# EAGLE board rPiMotorShield (do last) (EAGLE 7.5.0)
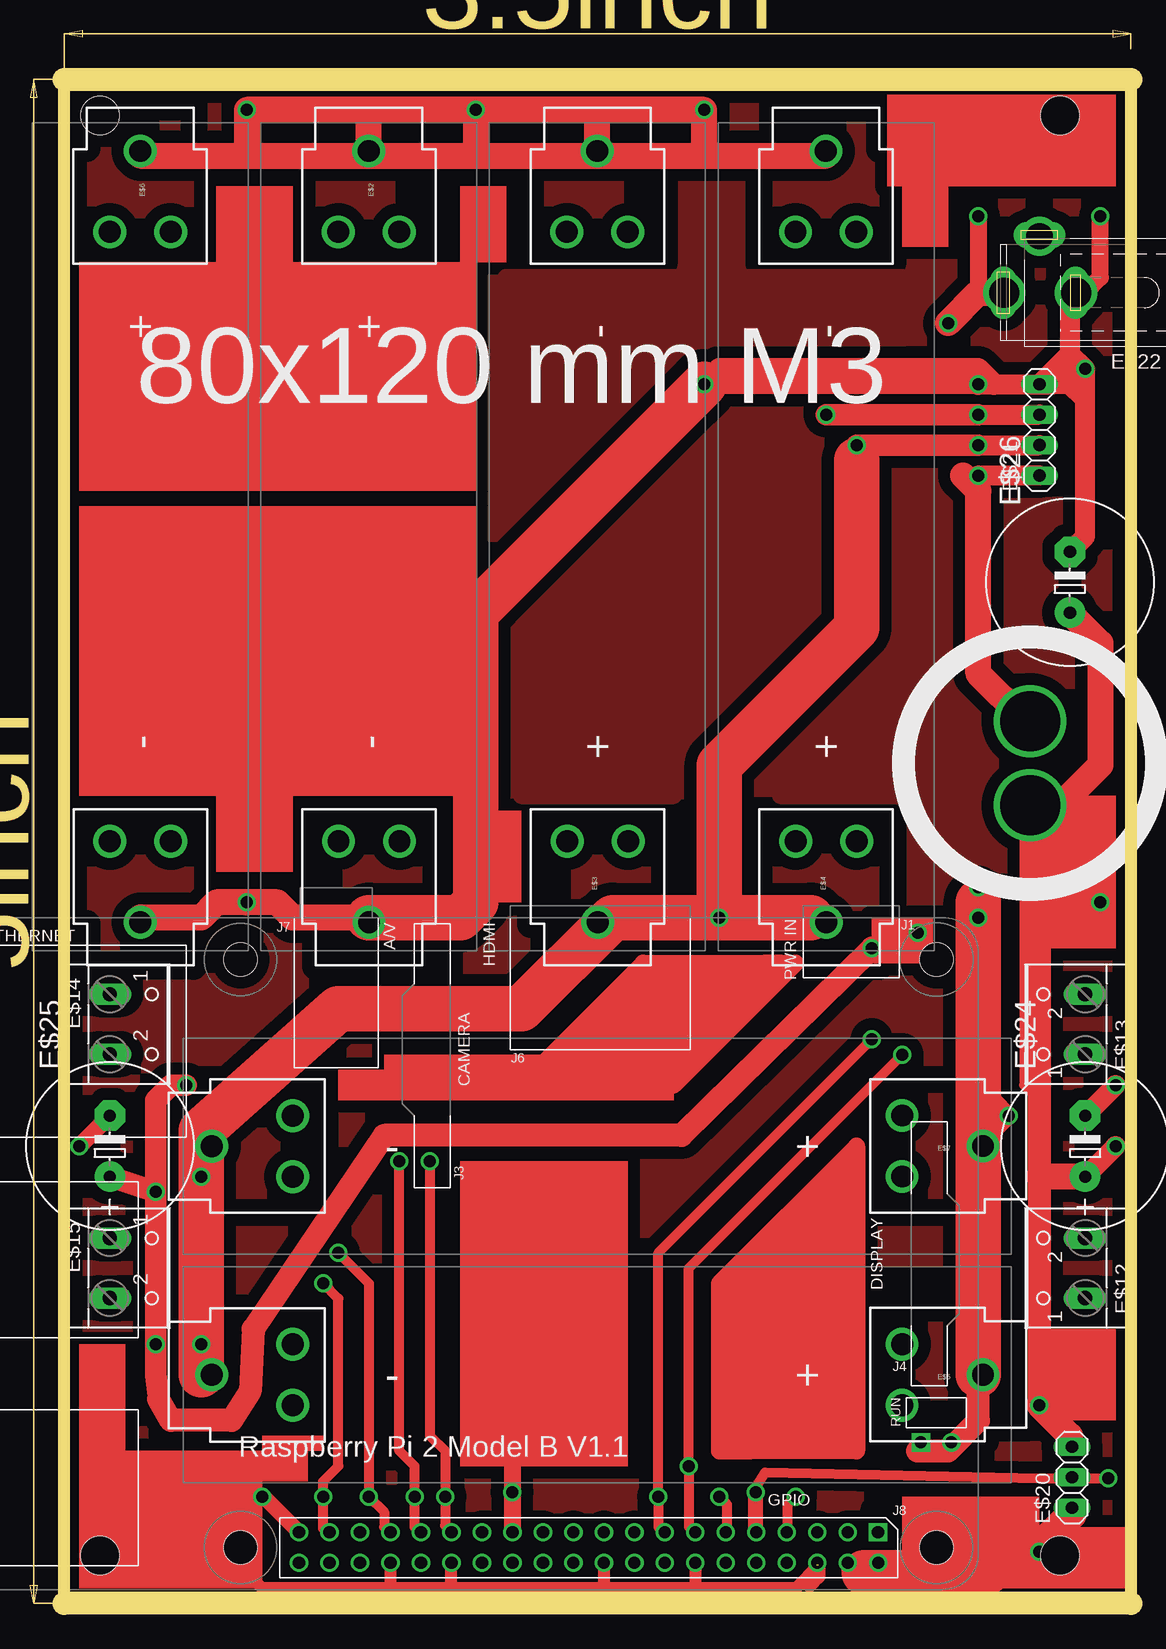
[diagram p0: board, top side]
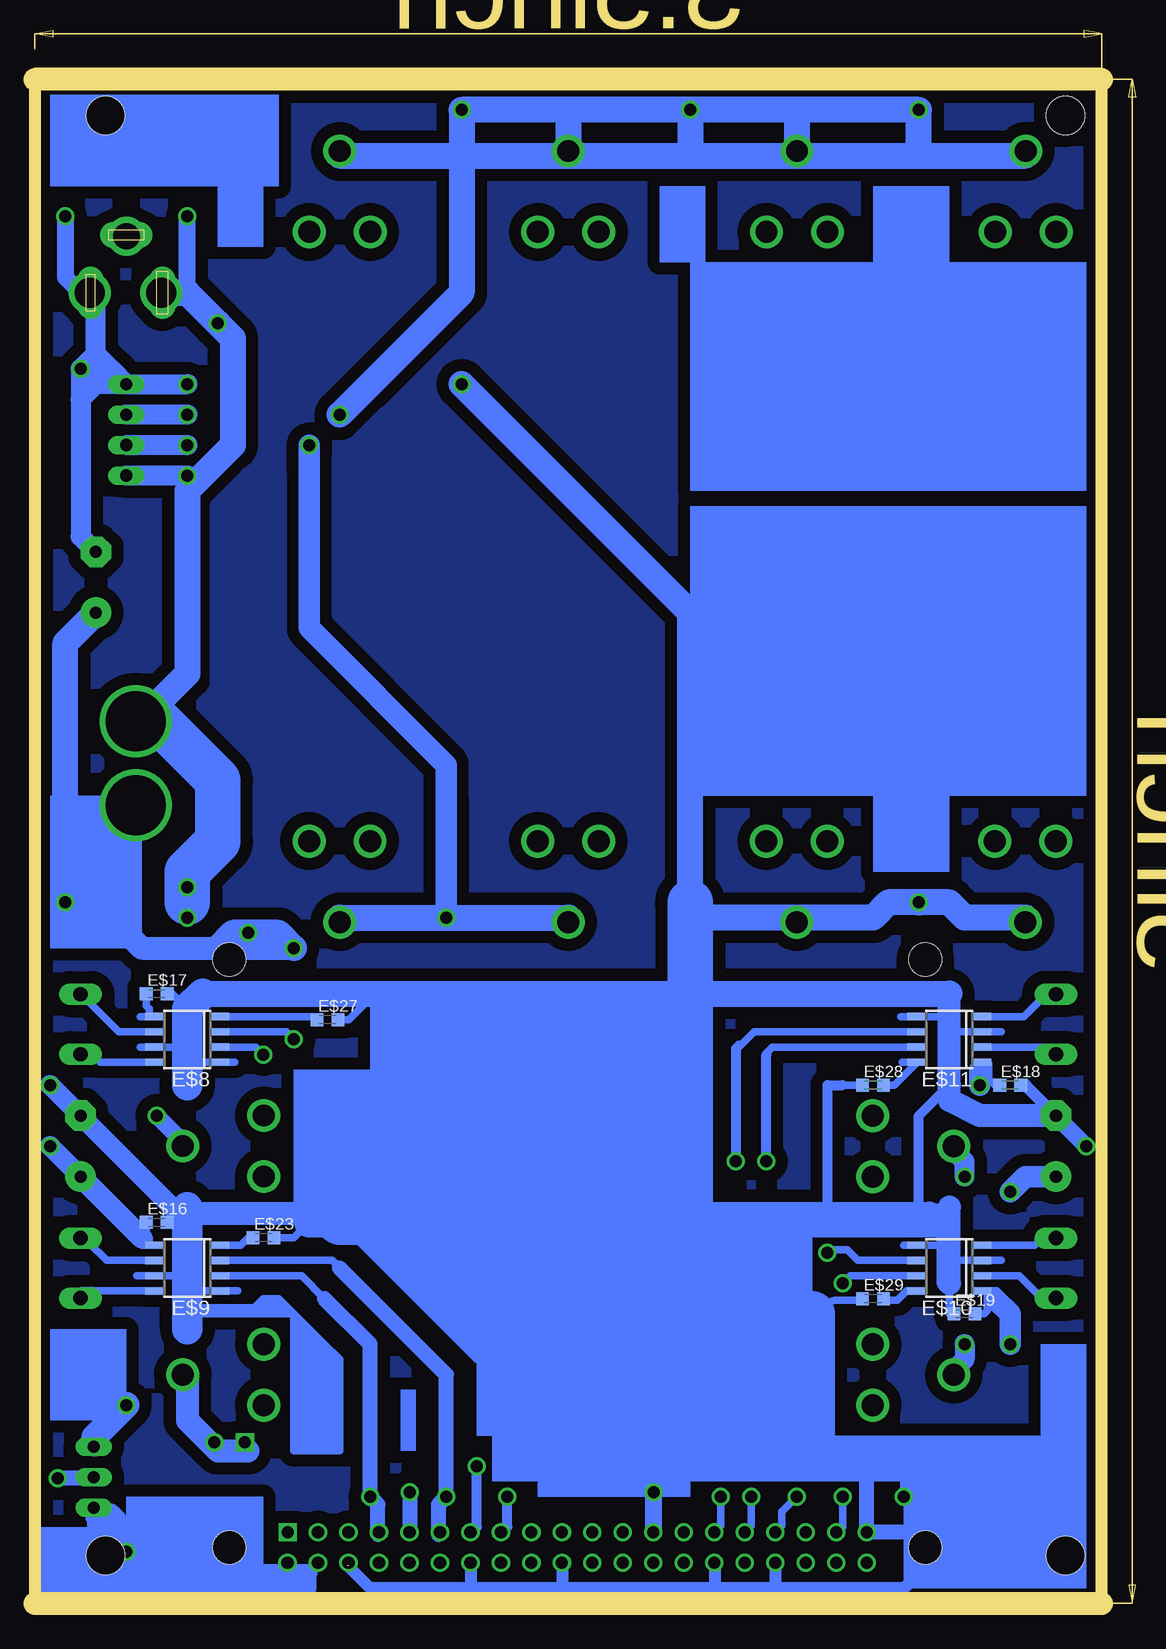
[diagram p1: board, bottom side, seen from below]

Size 88.9 x 127 mm. Coordinates in mm from the lower left corner, seen from the top.
Outline: 0,0 0,127 88.9,127 88.9,0 0,0
Copper layers (1*16): Top 0.035mm / dielectric 1.5mm / Bottom 0.035mm
Design rules "default": minimum track width 10mil, minimum drill 0.6mm, track to track 8mil, track to pad 8mil, pad to pad 8mil, via to via 8mil, smd to smd 8mil, copper to edge 40mil, drill to drill 8mil, minimum pad ring 10mil, minimum via ring 8mil, stop-mask expansion 4mil, vias tented up to drill 0mil, thermal gap 10mil
Holes 3.2 mm at 3,124 83,124 83,4 3,4

## Footprints (pad centres in the part's own frame; a part is rotated, then mirrored left to right if it is on the bottom)
RPI2 = drill 1.016 square: P$1 8.37,51.23; P$41 4.8,43.74 | drill 1.016: P$2 8.357,53.772; P$3 10.897,51.232; P$4 10.897,53.772; P$5 13.437,51.232; P$6 13.437,53.772; P$7 15.977,51.232; P$8 15.977,53.772; P$9 18.517,51.232; P$10 18.517,53.772; P$11 21.057,51.232; P$12 21.057,53.772; P$13 23.597,51.232; P$14 23.597,53.772; P$15 26.137,51.232; P$16 26.137,53.772; P$17 28.677,51.232; P$18 28.677,53.772; P$19 31.217,51.232; P$20 31.217,53.772; P$21 33.757,51.232; P$22 33.757,53.772; P$23 36.297,51.232; P$24 36.297,53.772; P$25 38.837,51.232; P$26 38.837,53.772; P$27 41.377,51.232; P$28 41.377,53.772; P$29 43.917,51.232; P$30 43.917,53.772; P$31 46.457,51.232; P$32 46.457,53.772; P$33 48.997,51.232; P$34 48.997,53.772; P$35 51.537,51.232; P$36 51.537,53.772; P$37 54.077,51.232; P$38 54.077,53.772; P$39 56.617,51.232; P$40 56.617,53.772; P$42 2.26,43.74 | hole 2.75: 3.5,3.5; 61.5,3.5; 3.5,52.5; 61.5,52.5
BATTERY_18650-HOLDER = drill 1.829: GND@1 32.128,0.01; GND@2 25.38,2.55; GND@3 25.38,-2.53; PWR@1 -32.128,-0.01; PWR@2 -25.38,2.53; PWR@3 -25.38,-2.55
D_R-PDSO-G8 = smd 0.6 x 1.5: 1 -1.905,-2.75; 2 -0.635,-2.75; 3 0.635,-2.75; 4 1.905,-2.75; 5 1.905,2.75; 6 0.635,2.75; 7 -0.635,2.75; 8 -1.905,2.75
2PIN-SCREW-TERMINAL = drill 1.194 long: 1 -2.5,-1.27; 2 2.5,-1.27
C0603K = smd 1.05 x 1.08: 1 -0.875,0; 2 0.875,0
1X03 = drill 1.016 long: 1 -2.54,0; 2 0,0; 3 2.54,0
1X04 = drill 1.016 long: 1 -3.81,0; 2 -1.27,0; 3 1.27,0; 4 3.81,0
5.5-2.5-BARRELCONNECTOR = drill 0.8 pad 2.184 long: 1 -3,0; 2 0,-4.8 | drill 1 pad 2.184 long: 3 3,0 | drill 2.5: P$1 -3.048,0; P$2 2.921,0 | drill 2.2: P$3 0,-4.699
E5-13 = drill 1.016 pad 2.54: + -2.54,0 | drill 1.016 pad 2.54 octagon: - 2.54,0

## Placement (x,y rotation side)
E$1  [RPI2]  76.2,57.15 180 top
E$2  [BATTERY_18650-HOLDER]  25.4,88.9 270 top
E$3  [BATTERY_18650-HOLDER]  44.45,88.9 90 top
E$4  [BATTERY_18650-HOLDER]  63.5,88.9 90 top
E$5  [BATTERY_18650-HOLDER]  44.45,19.05 180 top
E$6  [BATTERY_18650-HOLDER]  6.35,88.9 270 top
E$7  [BATTERY_18650-HOLDER]  44.45,38.1 180 top
E$8  [D_R-PDSO-G8]  76.2,46.99 90 bottom
E$9  [D_R-PDSO-G8]  76.2,27.94 90 bottom
E$10  [D_R-PDSO-G8]  12.7,27.94 90 bottom
E$11  [D_R-PDSO-G8]  12.7,46.99 90 bottom
E$12  [2PIN-SCREW-TERMINAL]  83.82,27.94 90 top
E$13  [2PIN-SCREW-TERMINAL]  83.82,48.26 90 top
E$14  [2PIN-SCREW-TERMINAL]  5.08,48.26 270 top
E$15  [2PIN-SCREW-TERMINAL]  5.08,27.94 270 top
E$16  [C0603K]  78.74,31.75 0 bottom
E$17  [C0603K]  78.74,50.8 0 bottom
E$18  [C0603K]  7.62,43.18 0 bottom
E$19  [C0603K]  11.43,24.13 0 bottom
E$20  [1X03]  84,10.5 90 top
E$21  [1X04]  81.28,97.79 90 top
E$22  [5.5-2.5-BARRELCONNECTOR]  81.28,109.22 180 top
E$23  [C0603K]  69.85,30.48 0 bottom
E$24  [E5-13]  85.09,38.1 90 top
E$25  [E5-13]  3.81,38.1 90 top
E$26  [E5-13]  83.82,85.09 90 top
E$27  [C0603K]  64.52,48.64 0 bottom
E$28  [C0603K]  19.05,43.18 0 bottom
E$29  [C0603K]  19.05,25.4 0 bottom

## Library data of the parts
E$1 = e14_Rpi2_RevA
E$2-E$7 E$12-E$15 E$20-E$22 = ISCTRainingProgram
E$8-E$11 = texas-sn55-sn75
E$16-E$19 E$23-E$29 = rcl

## Nets
S$24: E$21.4 E$26.-
S$25: E$25.-
S$28: E$21.3
S$32: E$21.1
S$34: E$24.-
S$35: E$21.2
S$37: E$24.+ E$25.+ E$26.+

## Tracks (layer width: path | path; a pad name or v marks a point on that pad's centre or on a via)
S$1  (via drill 5)
  other vias: 80.5,66.5
S$2  (via drill 5)
  other vias: 80.5,73.5
S$3
  Top 3.81: 66.67,2.54 76.83,2.54 78.74,4.45
S$4  (via drill 1)
  Top 0.813: 55.24,5.71 55.24,8.26 v54.61,8.89
  Bottom 0.61: 72.77,28.57 64.14,28.57 63.25,27.69
  Bottom 1.27: 55.24,5.71 55.24,8.26 v54.61,8.89 54.61,19.05 63.25,27.69 63.5,27.94
S$5
  Top 2.54: 78.99,4.7 81.28,4.7 83.95,7.37
S$6  (via drill 1)
  Bottom 1.27: 84.07,8 84.07,7.11 v81.28,4.32
S$7  (via drill 1)
  Top 0.813: 57.66,9.65 58.42,10.92 81.41,10.41 v87,10.41
  Bottom 1.27: 83.57,10.41 v87,10.41
S$8
  Bottom 1.27: 83.82,7.62 80.01,3.81 78.74,3.81 77.47,2.54 76.2,1.27 66.04,1.27 66.04,2.54
  Bottom 1.422: 66.04,2.54 73.66,2.54 | 73.66,2.54 74.93,2.54 | 74.93,2.54 76.2,2.54 | 76.2,2.54 77.47,2.54 | 77.47,2.54 80.01,2.54 83.82,6.35 83.82,7.62 82.55,7.62 81.28,6.35 | 81.28,6.35 77.47,2.54 | 76.2,2.54 78.74,5.08 | 78.74,5.08 80.01,6.35 81.28,6.35 | 74.93,2.54 76.2,3.81 | 76.2,3.81 77.47,5.08 78.74,5.08 | 73.66,2.54 74.93,3.81 76.2,3.81
S$9  (via drill 1)
  Top 1.27: 57.66,6.22 v57.66,9.27
  Bottom 1.27: v57.66,9.27 57.66,6.22
S$10
  Bottom 0.61: 79.5,26.04 85.09,26.04
S$11  (via drill 1)
  Top 0.813: 60.33,5.71 60.33,8.26 v60.96,8.89
  Bottom 0.61: 73.03,27.3 66.67,27.3 64.77,25.4
  Bottom 1.27: 60.33,5.71 60.33,8.26 v60.96,8.89 60.96,21.59 64.77,25.4
S$12
  Bottom 0.61: 79.5,28.57 82.93,28.57 84.33,29.97
S$13
  Bottom 0.61: 79.5,45.09 83.44,45.09 83.95,45.59
S$14
  Bottom 0.61: 79.5,47.62 81.92,47.62 84.45,50.16
S$15
  Bottom 0.61: 9.4,27.3 6.86,27.3 4.83,25.27
S$16
  Bottom 0.61: 9.4,29.84 5.59,29.84 5.08,30.35
S$17
  Bottom 0.61: 9.4,46.35 4.83,46.35 4.45,45.97
S$18
  Bottom 0.61: 9.4,48.9 6.48,48.9 4.7,50.67
S$19
  Bottom 0.61: 9.4,44.96 9.4,43.69 8.76,43.05 8.51,43.31
S$20
  Bottom 0.61: 9.53,25.91 9.53,24.38 9.78,24.13 10.16,24.13
S$21
  Bottom 0.61: 79.38,29.97 79.38,30.48 79.63,30.73 79.63,31.5
S$22
  Bottom 0.61: 79.63,50.55 79.63,49.78 79.38,49.53 79.38,48.9 80.14,48.9
S$23  (via drill 1)
  Top 1.422: 85.09,109.22 86.36,110.49 v86.36,115.57
  Bottom 1.422: v86.36,115.57 86.36,110.49 85.09,109.22
S$24  (via drill 1)
  Top 1.676: E$21.4 77.47,101.6 v76.2,101.6 v53.34,101.6 | 83.82,109.22 83.82,104.14 | 83.82,104.14 E$21.4 | E$26.- 85.09,88.9 85.09,100.33 | 85.09,100.33 v85.09,102.87 83.82,104.14 | 85.09,100.33 83.82,101.6 E$21.4 | E$21.4 82.55,101.6 83.82,102.87
  Top 1.778: v76.2,101.6 76.2,102.87 | 76.2,102.87 54.61,102.87 v53.34,101.6 | 76.2,102.87 77.47,101.6
  Top 2.184: 25.4,57.15 19.05,57.15 17.78,58.42 v15.24,58.42 12.7,58.42 11.43,57.15 6.35,57.15
  Top 3.81: 25.4,57.15 33.02,57.15 34.29,58.42 34.29,82.55 v53.34,101.6
  Bottom 1.676: E$21.4 v76.2,101.6 | E$21.4 83.82,104.14 | 83.82,104.14 83.82,109.22 | 83.82,104.14 v85.09,102.87 85.09,100.33 | 85.09,100.33 85.09,88.9 E$26.- | 83.82,102.87 82.55,102.87 E$21.4 | E$21.4 83.82,101.6 85.09,100.33
  Bottom 2.184: 6.35,57.15 11.43,57.15 12.7,58.42 v15.24,58.42 17.78,58.42 19.05,57.15 33.02,57.15 34.29,58.42 34.29,82.55 v53.34,101.6
  Bottom 3.81: 34.29,58.42 34.29,33.02
S$25  (via drill 1)
  Top 1.422: v1.27,38.1 E$25.-
  Bottom 0.61: 77.47,50.8 76.2,49.53
  Bottom 0.813: 15.24,33.02 15.24,40.64 12.7,43.18
  Bottom 1.016: 6.35,43.18 E$25.-
  Bottom 1.422: E$25.- v1.27,38.1
  Bottom 1.93: E$25.- 10.16,40.64 12.7,41.91 12.7,43.18 12.7,50.8
  Bottom 2.184: 74.93,50.8 12.7,50.8
  Bottom 2.54: 76.2,43.18 76.2,49.53 74.93,50.8
S$26
  Bottom 3.81: 24.13,13.97 24.13,24.13 26.67,24.13 27.94,25.4
S$27
  Bottom 0.61: 72.77,47.62 67.94,47.62 67.18,46.86
S$28  (via drill 1)
  Top 1.676: v76.2,99.06 E$21.3
  Top 1.778: v63.5,99.06 v76.2,99.06
  Top 2.184: 6.35,120.65 15.24,120.65 | 15.24,120.65 25.4,120.65 | 25.4,120.65 34.29,120.65 | 34.29,120.65 44.45,120.65 | 44.45,120.65 53.34,120.65 | 53.34,120.65 63.5,120.65 | 53.34,120.65 v53.34,124.46 44.45,124.46 | 44.45,124.46 v34.29,124.46 | v34.29,124.46 25.4,124.46 | 25.4,124.46 v15.24,124.46 15.24,120.65 | v34.29,124.46 34.29,120.65 | 44.45,120.65 44.45,124.46 | 25.4,120.65 25.4,124.46
  Bottom 1.676: v76.2,99.06 E$21.3
  Bottom 2.184: 63.5,120.65 53.34,120.65 | 53.34,120.65 44.45,120.65 | 44.45,120.65 34.29,120.65 | 34.29,120.65 25.4,120.65 | 25.4,120.65 15.24,120.65 | 15.24,120.65 6.35,120.65 | 15.24,120.65 v15.24,124.46 25.4,124.46 | v34.29,124.46 34.29,120.65 | v53.34,124.46 53.34,120.65 | 25.4,124.46 44.45,124.46 | 44.45,124.46 v53.34,124.46 | 44.45,124.46 44.45,120.65 | 25.4,124.46 25.4,120.65 | v53.34,124.46 53.34,109.22 v63.5,99.06
S$29
  Bottom 0.61: 72.9,46.35 70.48,46.35 69.6,45.47
S$30
  Bottom 0.61: 73.53,45.09 75.95,45.09 76.07,44.96
S$31  (via drill 1)  (3 unrouted)
  Top 1.422: 76.2,38.1 v78.74,40.64 77.47,41.91 | v76.2,115.57 76.2,109.22
  Top 1.93: 71.12,12.7 73.66,12.7 76.2,15.24 76.2,19.05
  Top 2.184: 80.01,73.66 76.2,77.47 76.2,92.71 74.93,93.98 | v73.66,106.68 76.2,109.22 77.47,109.22
  Top 3.81: 76.2,19.05 76.2,38.1 v76.2,57.15 76.2,58.42
  Bottom 1.422: 76.2,38.1 v78.74,40.64 | 76.2,109.22 v76.2,115.57
  Bottom 1.93: 76.2,19.05 76.2,15.24 73.66,12.7 71.12,12.7
  Bottom 2.184: 77.47,109.22 76.2,109.22 v73.66,106.68 72.39,105.41 72.39,96.52 76.2,92.71 76.2,77.47 80.01,73.66
  Bottom 3.81: 76.2,58.42 v76.2,59.69 76.2,60.96 73.66,63.5 73.66,68.58 78.74,73.66 80.01,73.66
S$32  (via drill 1)
  Top 1.676: E$21.1 v76.2,93.98
  Bottom 1.676: v76.2,93.98 E$21.1
S$33
  Bottom 0.61: 74.17,26.04 75.95,26.04 77.22,27.3 78.49,27.3
S$34  (via drill 1)
  Top 1.676: E$24.- v87.63,43.18
  Bottom 0.61: 12.7,24.13 12.7,26.67 | 12.7,33.02 13.97,33.02
  Bottom 1.676: 76.2,33.02 77.47,33.02 E$24.- v87.63,43.18
  Bottom 1.93: 76.2,32.51 14.35,32.51 12.83,30.99 12.83,26.8 12.7,26.67 12.7,33.02
  Bottom 2.54: 76.2,22.86 76.2,32.51 76.2,33.02
S$35  (via drill 1)
  Top 1.676: v76.2,96.52 E$21.2
  Top 1.778: v66.04,96.52 v76.2,96.52
  Top 2.184: 44.45,57.15 45.72,57.15 v54.61,57.15 62.23,57.15 63.5,57.15
  Top 3.81: 11.43,19.05 v11.43,21.59 v11.43,35.56 11.43,39.37 22.86,49.53 38.1,49.53 45.72,57.15 62.23,57.15
  Bottom 1.676: v76.2,96.52 E$21.2 | v11.43,35.56 11.43,36.83 12.7,38.1 | v11.43,21.59 11.43,20.32 12.7,19.05
  Bottom 1.778: v66.04,96.52 66.04,81.28 54.61,69.85 v54.61,57.15
  Bottom 2.184: 63.5,57.15 v54.61,57.15 44.45,57.15
S$36
  Top 3.81: 54.61,58.42 54.61,69.85 66.04,81.28 66.04,95.25
S$37  (via drill 1)
  Top 0.406: 81.28,43.18 80.01,43.18
  Top 0.813: 80.01,66.04 80.01,43.18 81.28,41.91
  Top 1.676: E$24.+ v87.63,38.1
  Top 1.778: v10.16,43.18 8.89,43.18 7.62,41.91 v7.62,34.29 | 7.87,17.02 7.62,19.05 v7.62,21.59 v7.62,34.29 | v7.62,34.29 E$25.+
  Top 1.93: 81.28,67.31 81.28,64.77 81.28,58.42 81.28,43.18 81.28,41.91 81.28,35.56 v81.28,16.51 | v67.31,54.61 51.44,38.99 26.67,38.99 15.75,22.86 15.49,17.65 13.97,15.24 8.89,15.24 7.87,17.02
  Top 2.184: E$26.+ 86.36,80.01 86.36,69.85 81.28,64.77 | 83.82,13.59 83.82,13.97 v81.28,16.51 | 81.28,58.42 v86.36,58.42 | E$24.+ 81.28,35.56
  Top 3.81: 81.28,64.77 85.09,60.96 85.09,59.69 83.82,59.69 82.55,60.96
  Bottom 1.676: E$24.+ v87.63,38.1
  Bottom 1.778: 80.01,30.48 E$24.+ | E$25.+ 6.35,35.56 v7.62,34.29 | v10.16,43.18 10.16,44.45 | v7.62,21.59 7.62,24.13 8.89,25.4
  Bottom 1.93: v86.36,58.42 83.82,58.42 80.01,54.61 73.66,54.61 v67.31,54.61
  Bottom 2.184: v86.36,58.42 86.36,80.01 E$26.+ | 83.95,13.34 83.95,13.84 v81.28,16.51 | v67.31,54.61 68.58,55.88 v71.12,55.88 72.39,55.88 73.66,54.61
S$38
  Bottom 0.61: 72.9,29.84 71.75,29.84 71.12,30.48
S$39
  Bottom 0.61: 68.58,30.48 67.31,30.48 66.04,31.75 | 52.07,20.32 63.5,31.75
  Bottom 2.54: 13.97,31.75 63.5,31.75 66.04,31.75
  Bottom 3.81: 63.5,31.75 60.96,31.75 49.53,20.32 49.53,22.86 57.15,30.48 53.34,30.48 50.8,27.94
S$40
  Bottom 0.61: 78.36,46.35 76.83,46.35
S$41
  Bottom 0.61: 72.77,48.9 65.53,48.9
S$42
  Bottom 0.61: 79.25,29.84 80.01,29.84 81.03,30.86
S$43
  Bottom 0.61: 63.25,48.64 62.74,48.64 61.34,50.04
S$44
  Bottom 0.61: 16,28.57 20.32,28.57 21.21,29.46 22.61,29.46 22.73,29.34
S$45  (via drill 1)
  Top 0.813: 52.45,5.97 52.07,6.35 v52.07,11.43 52.07,27.94 v69.85,45.72
  Bottom 0.813: 52.07,6.35 v52.07,11.43
S$46  (via drill 1)
  Top 0.813: 50.04,5.84 49.53,6.35 v49.53,8.89 49.53,29.21 v67.31,46.99
  Bottom 0.813: 49.53,6.35 v49.53,8.89
S$47
  Bottom 0.61: 17.78,43.18 17.27,43.18 15.49,44.96
S$48
  Bottom 0.61: 14.99,48.9 13.08,48.9
S$49
  Bottom 0.61: 10.54,47.62 12.45,47.62
S$50  (via drill 1)
  Top 1.422: 37.34,11.94 v37.34,9.27 37.34,5.97
  Bottom 1.422: 37.34,5.97 v37.34,9.27 37.34,11.94
S$51
  Top 1.422: 39.37,44.45 48.26,53.34 58.42,53.34 | 59.69,53.34 60.96,53.34 50.8,43.18 50.8,44.45 59.69,53.34 | 59.69,53.34 58.42,53.34 | 58.42,53.34 57.15,52.07 | 57.15,52.07 50.8,45.72 49.53,45.72 | 45.72,45.72 41.91,45.72 43.18,46.99 | 43.18,46.99 48.26,52.07 55.88,52.07 | 57.15,52.07 55.88,52.07 | 55.88,52.07 54.61,50.8 | 54.61,50.8 49.53,45.72 | 49.53,45.72 45.72,45.72 | 45.72,45.72 44.45,46.99 | 52.07,50.8 53.34,50.8 | 54.61,50.8 53.34,50.8 | 53.34,50.8 49.53,46.99 48.26,46.99 | 45.72,46.99 44.45,46.99 | 43.18,46.99 44.45,46.99 | 44.45,46.99 48.26,50.8 49.53,50.8 | 50.8,50.8 52.07,50.8 | 52.07,50.8 48.26,46.99 | 48.26,46.99 46.99,46.99 | 46.99,46.99 45.72,46.99 | 45.72,46.99 49.53,50.8 | 49.53,50.8 50.8,50.8 | 50.8,50.8 46.99,46.99
S$52
  Top 1.422: 57.15,12.7 54.61,12.7 54.61,26.67 66.04,38.1 66.04,12.7 57.15,12.7 | 57.15,12.7 58.42,13.97
S$53
  Bottom 0.61: 16.13,47.62 28.96,47.62 30.48,46.1
S$54
  Bottom 0.61: 16,46.35 27.43,46.35 27.94,45.85
S$55
  Bottom 1.27: 19.56,6.1 19.56,10.79
S$56
  Bottom 1.27: 19.56,5.97 15.62,5.97
S$57
  Top 1.27: 19.56,5.97 16.89,8.64
S$58  (via drill 1)
  Bottom 0.61: v16.51,8.89 16.51,10.16
S$59
  Bottom 0.61: 9.4,26.04 8.76,26.04 8.13,25.4
S$60
  Bottom 0.61: 10.54,28.57 12.32,28.57
S$61
  Bottom 0.61: 14.73,29.84 13.08,29.84 12.95,29.72
S$62
  Bottom 0.61: 16,26.04 16.26,26.04 17.02,25.27 18.16,25.27
S$63
  Bottom 0.61: 20.07,25.27 22.23,25.27 25.02,24.26
S$64
  Top 1.422: 55.88,26.67 64.77,35.56 64.77,34.29 57.15,26.67
S$65  (via drill 1)
  Top 0.813: v22.86,29.21 25.4,26.67 25.4,8.89 26.67,7.62 26.67,6.35 27.3,5.71
S$66  (via drill 1)
  Top 0.813: v30.48,36.83 30.48,13.97 31.75,12.7 v31.75,8.89 31.75,6.48 32.26,5.97
  Bottom 0.61: v31.75,8.89 31.75,6.48 32.26,5.97
  Bottom 0.813: 30.23,46.48 30.48,46.23 v30.48,36.83
S$67
  Bottom 0.61: 20.19,43.18 21.59,43.18 22.35,43.18
  Bottom 0.813: 22.86,33.02 22.86,43.18 21.59,43.18
S$68  (1 unrouted)
  Top 1.016: 27.18,3.3 27.18,1.4
  Bottom 1.016: 27.18,1.4 27.18,3.3
S$69  (via drill 1)
  Top 0.813: 29.72,5.97 29.34,6.35 29.21,6.35 v29.21,8.89 29.21,11.43 27.94,12.7 v27.94,36.83
  Bottom 0.61: v29.21,8.89 29.21,6.48 29.72,5.97
  Bottom 0.813: v27.94,36.83 27.94,45.72
S$70  (via drill 1)
  Top 0.813: 21.59,6.35 v21.59,8.89 21.59,10.16 22.86,11.43 22.86,25.4 v21.59,26.67
  Bottom 0.61: 15.88,27.3 20.95,27.3 v21.59,26.67 | v21.59,8.89 21.59,6.35 22.23,5.71
S$71
  Top 0.813: 21.59,6.22 21.72,6.22 21.97,5.97
S$72  (via drill 1)
  Bottom 0.61: v25.4,8.89 26.67,7.62 26.67,6.48 27.18,5.97
S$73
  pour Bottom: 38.1,81.28 55.88,99.06 59.69,99.06 63.5,95.25 63.5,82.55 52.07,71.12 52.07,67.31 38.1,67.31
S$74
  pour Top: 55.88,97.79 54.61,97.79 38.1,81.28 38.1,67.31 50.8,67.31 50.8,71.12 62.23,82.55 62.23,95.25 59.69,97.79
S$75
  pour Top: 36.83,91.44 36.83,110.49 69.85,110.49 69.85,105.41 50.8,105.41
S$76
  pour Bottom: 72.39,73.66 66.04,67.31 58.42,67.31 68.58,77.47 68.58,93.98 71.12,93.98 73.66,91.44 73.66,74.93
S$77
  pour Top: 69.85,92.71 69.85,78.74 59.69,68.58 59.69,67.31 74.93,67.31 74.93,72.39 72.39,74.93 72.39,91.44 71.12,92.71
S$78  (2 unrouted)
  Top 1.016: 15.24,2.54 16.51,1.27 32.26,1.27 | 62.87,3.17 60.96,1.27 52.58,1.27 | 52.58,1.27 32.26,1.27 | 32.26,1.27 32.26,3.3 | 52.58,3.43 52.58,1.27
  Top 1.422: 62.74,3.17 62.74,2.29 62.1,1.65
  Bottom 1.016: 15.24,2.54 16.51,1.27 32.26,1.27 | 32.26,1.27 60.96,1.27 62.87,3.17 | 32.26,3.3 32.26,1.27
S$79
  Top 1.016: 44.96,3.3 44.96,1.14
S$80
  Bottom 1.016: 52.58,3.43 52.58,1.4
S$81
  Bottom 1.016: 44.96,3.3 44.96,1.14
S$82
  Bottom 0.61: 79.5,46.35 80.14,46.35
S$83
  Bottom 0.61: 72.9,45.09 72.26,45.09
S$84
  Bottom 0.61: 15.88,48.9 16.76,48.9
S$85
  Bottom 0.61: 9.4,47.62 8.38,47.62
S$86
  Bottom 0.61: 16,45.09 16.64,45.09
S$87
  Bottom 0.61: 9.27,28.57 8.38,28.57
S$88
  Bottom 0.61: 16,29.84 16.51,29.84
S$89
  Bottom 0.61: 79.25,27.3 80.39,27.3
S$90
  Bottom 0.61: 73.03,26.04 72.01,26.04
S$91
  Bottom 0.61: 74.93,24.13 71.12,24.13 | 68.58,25.4 68.58,24.13 | 70.36,24.13 69.85,24.13 | 69.85,24.13 68.58,25.4 | 68.58,25.4 69.85,25.4 | 69.85,25.4 68.58,24.13 | 68.58,24.13 69.85,24.13 | 69.85,24.13 69.85,24.64 | 69.85,24.64 69.85,25.4 | 69.85,25.4 69.98,25.27 70.61,24.64 | 70.61,24.64 71.12,24.13 | 71.12,24.13 70.36,24.13 | 70.36,24.13 69.85,24.64 | 69.85,24.64 67.82,24.64 | 67.82,24.64 67.31,24.13 | 67.82,24.64 68.58,25.4 | 68.58,24.13 67.31,24.13 | 64.77,20.32 64.77,21.59 | 64.77,21.59 67.31,24.13 | 67.31,24.13 67.31,22.86 | 67.31,20.32 67.31,12.7 63.5,12.7 63.5,20.32 64.77,21.59 | 64.77,21.59 66.04,21.59 67.31,20.32 | 67.31,20.32 67.31,22.86 | 67.31,22.86 64.77,20.32 | 64.77,20.32 64.14,20.32 | 64.01,20.32 64.14,20.32 | 64.14,20.32 67.06,23.24 67.06,20.7 66.55,20.19 65.41,20.19 65.15,20.45 65.53,20.45 66.8,21.72 66.8,20.95 66.17,20.32 | 75.06,24.64 70.61,24.64
S$92
  pour Bottom (isolate 1.016): 0,127 88.9,127 88.9,0 0,0
S$93
  pour Top (isolate 1.016): 0,127 88.9,127 88.9,0 0,0
(copper drawn outside any net)
  shapes: Bottom area x25, Top area x27

## Text on the board
tPlace: 80x120 mm M3